# EAGLE board PCB Stream Desk STM32 (EAGLE 7.7.0)
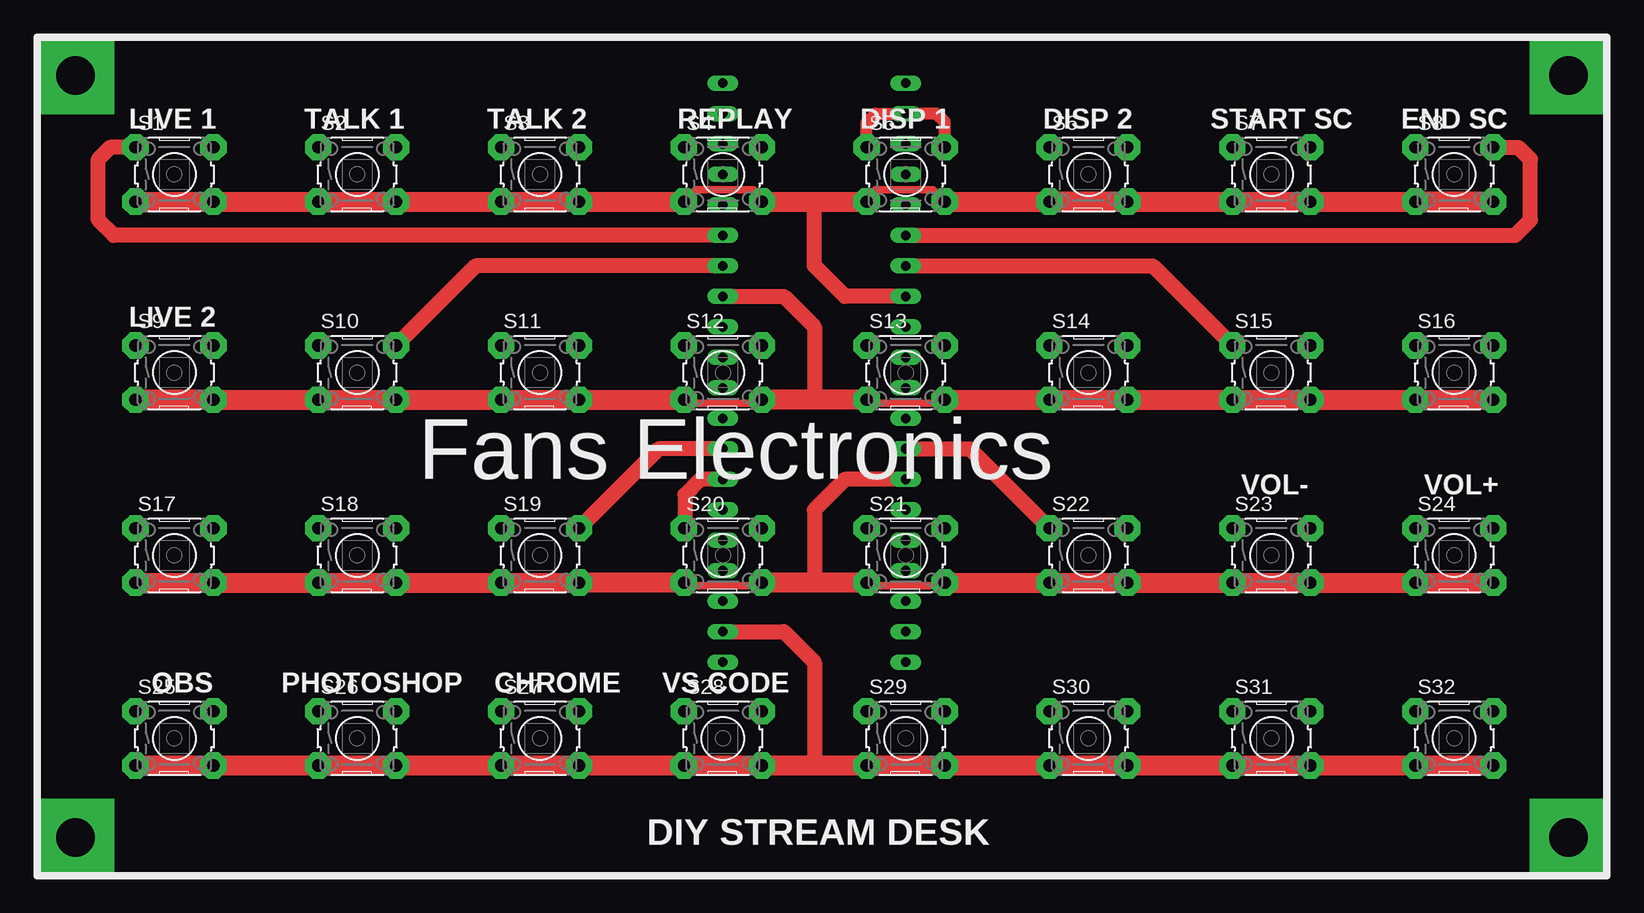
[diagram p0: board, top side]
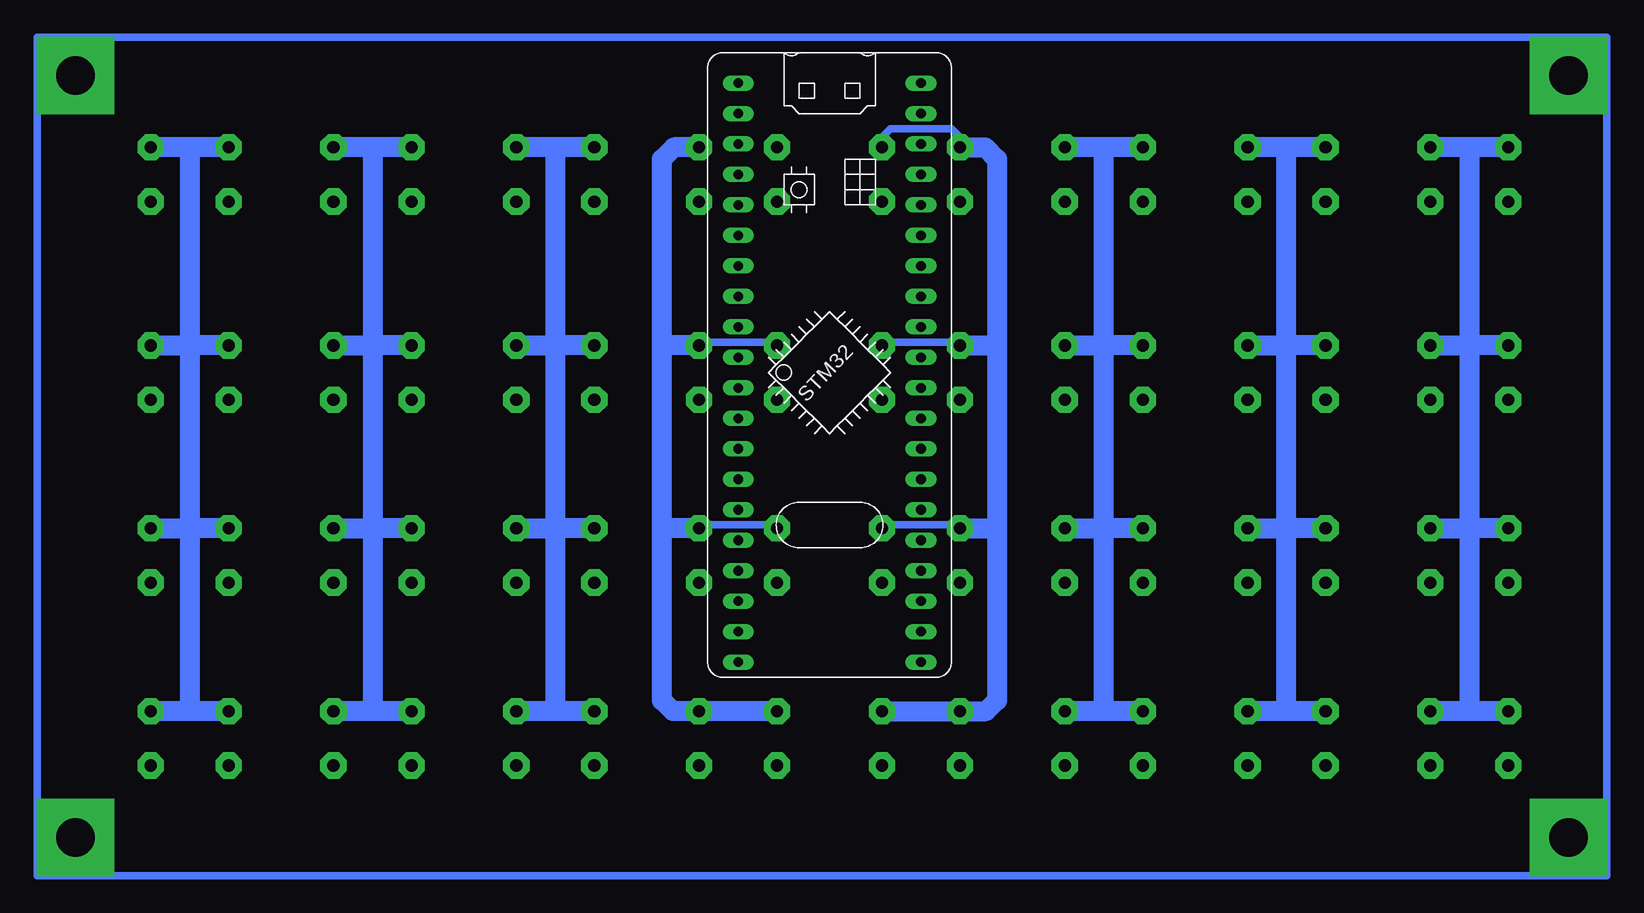
[diagram p1: board, bottom side, seen from below]

No outline drawn. Coordinates in mm, seen from the top.
Copper layers (1*16): Top 0.035mm / dielectric 1.5mm / Bottom 0.035mm
Design rules "default": minimum track width 10mil, minimum drill 24mil, track to track 8mil, track to pad 8mil, pad to pad 8mil, via to via 8mil, smd to smd 8mil, copper to edge 40mil, drill to drill 8mil, minimum pad ring 10mil, minimum via ring 8mil, stop-mask expansion 4mil, vias tented up to drill 0mil, thermal gap 10mil

## Footprints (pad centres in the part's own frame; a part is rotated, then mirrored left to right if it is on the bottom)
TACT-6X6MM-OCTAGON = drill 1.016 pad 2.184 octagon: 1 -3.251,2.261; 2 3.251,2.261; 3 -3.251,-2.261; 4 3.251,-2.261
BLUE_PILL = drill 0.8 long: 1 -7.62,15.24; 2 -7.62,12.7; 3 -7.62,10.16; 4 -7.62,7.62; 5 -7.62,5.08; 6 -7.62,2.54; 7 -7.62,0; 8 -7.62,-2.54; 9 -7.62,-5.08; 10 -7.62,-7.62; 11 -7.62,-10.16; 12 -7.62,-12.7; 13 -7.62,-15.24; 14 -7.62,-17.78; 15 -7.62,-20.32; 16 -7.62,-22.86; 17 -7.62,-25.4; 18 -7.62,-27.94; 19 -7.62,-30.48; 20 -7.62,-33.02; 21 7.62,-33.02; 22 7.62,-30.48; 23 7.62,-27.94; 24 7.62,-25.4; 25 7.62,-22.86; 26 7.62,-20.32; 27 7.62,-17.78; 28 7.62,-15.24; 29 7.62,-12.7; 30 7.62,-10.16; 31 7.62,-7.62; 32 7.62,-5.08; 33 7.62,-2.54; 34 7.62,0; 35 7.62,2.54; 36 7.62,5.08; 37 7.62,7.62; 38 7.62,10.16; 39 7.62,12.7; 40 7.62,15.24

## Placement (x,y rotation side)
S1  [TACT-6X6MM-OCTAGON]  41.91,21.59 0 top
S2  [TACT-6X6MM-OCTAGON]  57.15,21.59 0 top
S3  [TACT-6X6MM-OCTAGON]  72.39,21.59 0 top
S4  [TACT-6X6MM-OCTAGON]  87.63,21.59 0 top
S5  [TACT-6X6MM-OCTAGON]  102.87,21.59 0 top
S6  [TACT-6X6MM-OCTAGON]  118.11,21.59 0 top
S7  [TACT-6X6MM-OCTAGON]  133.35,21.59 0 top
S8  [TACT-6X6MM-OCTAGON]  148.59,21.59 0 top
S9  [TACT-6X6MM-OCTAGON]  41.91,5.08 0 top
S10  [TACT-6X6MM-OCTAGON]  57.15,5.08 0 top
S11  [TACT-6X6MM-OCTAGON]  72.39,5.08 0 top
S12  [TACT-6X6MM-OCTAGON]  87.63,5.08 0 top
S13  [TACT-6X6MM-OCTAGON]  102.87,5.08 0 top
S14  [TACT-6X6MM-OCTAGON]  118.11,5.08 0 top
S15  [TACT-6X6MM-OCTAGON]  133.35,5.08 0 top
S16  [TACT-6X6MM-OCTAGON]  148.59,5.08 0 top
S17  [TACT-6X6MM-OCTAGON]  41.91,-10.16 0 top
S18  [TACT-6X6MM-OCTAGON]  57.15,-10.16 0 top
S19  [TACT-6X6MM-OCTAGON]  72.39,-10.16 0 top
S20  [TACT-6X6MM-OCTAGON]  87.63,-10.16 0 top
S21  [TACT-6X6MM-OCTAGON]  102.87,-10.16 0 top
S22  [TACT-6X6MM-OCTAGON]  118.11,-10.16 0 top
S23  [TACT-6X6MM-OCTAGON]  133.35,-10.16 0 top
S24  [TACT-6X6MM-OCTAGON]  148.59,-10.16 0 top
S25  [TACT-6X6MM-OCTAGON]  41.91,-25.4 0 top
S26  [TACT-6X6MM-OCTAGON]  57.15,-25.4 0 top
S27  [TACT-6X6MM-OCTAGON]  72.39,-25.4 0 top
S28  [TACT-6X6MM-OCTAGON]  87.63,-25.4 0 top
S29  [TACT-6X6MM-OCTAGON]  102.87,-25.4 0 top
S30  [TACT-6X6MM-OCTAGON]  118.11,-25.4 0 top
S31  [TACT-6X6MM-OCTAGON]  133.35,-25.4 0 top
S32  [TACT-6X6MM-OCTAGON]  148.59,-25.4 0 top
U$1  [BLUE_PILL]  95.25,13.97 0 bottom

## Library data of the parts
S1-S32 = FansElectronics-Switch
U$1 = BluePill

## Nets
COL1: S1.1 S1.2 S9.1 S9.2 S17.1 S17.2 S25.1 S25.2 U$1.35
COL2: S2.1 S2.2 S10.1 S10.2 S18.1 S18.2 S26.1 S26.2 U$1.34
COL3: S3.1 S3.2 S11.1 S11.2 S19.1 S19.2 S27.1 S27.2 U$1.28
COL4: S4.1 S4.2 S12.1 S12.2 S20.1 S20.2 S28.1 S28.2 U$1.27
COL5: S5.1 S5.2 S13.1 S13.2 S21.1 S21.2 S29.1 S29.2 U$1.2
COL6: S6.1 S6.2 S14.1 S14.2 S22.1 S22.2 S30.1 S30.2 U$1.13
COL7: S7.1 S7.2 S15.1 S15.2 S23.1 S23.2 S31.1 S31.2 U$1.7
COL8: S8.1 S8.2 S16.1 S16.2 S24.1 S24.2 S32.1 S32.2 U$1.6
GND1: U$1.40
ROW1: S1.3 S1.4 S2.3 S2.4 S3.3 S3.4 S4.3 S4.4 S5.3 S5.4 S6.3 S6.4 S7.3 S7.4 S8.3 S8.4 U$1.8
ROW2: S9.3 S9.4 S10.3 S10.4 S11.3 S11.4 S12.3 S12.4 S13.3 S13.4 S14.3 S14.4 S15.3 S15.4 S16.3 S16.4 U$1.33
ROW3: S17.3 S17.4 S18.3 S18.4 S19.3 S19.4 S20.3 S20.4 S21.3 S21.4 S22.3 S22.4 S23.3 S23.4 S24.3 S24.4 U$1.14
ROW4: S25.3 S25.4 S26.3 S26.4 S27.3 S27.4 S28.3 S28.4 S29.3 S29.4 S30.3 S30.4 S31.3 S31.4 S32.3 S32.4 U$1.22

## Tracks (layer width: path | path; a pad name or v marks a point on that pad's centre or on a via)
COL1
  Top 1.27: U$1.35 36.83,16.51 35.56,17.78 35.56,22.86 36.55,23.85 S1.1
  Bottom 1.676: 41.91,23.85 41.91,7.62 | 41.91,7.62 41.91,-7.62 | 41.91,-7.62 41.91,-8.26 | 41.91,-8.26 42.27,-7.9 S17.2 42.19,-7.9 41.91,-7.62 | S9.2 42.19,7.34 41.91,7.62 | S1.1 41.91,23.85 | 41.91,23.85 S1.2 | S17.1 41.63,-7.9 41.91,-7.62 | S9.1 41.63,7.34 41.91,7.62 | 41.91,-8.26 41.91,-23.14 | S25.1 41.91,-23.14 | 41.91,-23.14 S25.2
COL2
  Top 1.27: U$1.34 67.03,13.97 S10.2
  Bottom 1.676: 57.15,-23.14 57.15,-7.62 | 57.15,-7.62 57.15,7.62 | 57.15,7.62 57.15,23.85 | S10.2 59.69,7.34 57.43,7.34 | 57.43,7.34 57.15,7.62 | S18.2 57.43,-7.9 | 57.43,-7.9 57.15,-7.62 | S2.1 57.15,23.85 | 57.15,23.85 S2.2 | S18.1 57.43,-7.9 | S26.1 57.15,-23.14 | 57.15,-23.14 S26.2 | S10.1 57.43,7.34
COL3
  Top 1.27: U$1.28 82.27,-1.27 S19.2
  Bottom 1.676: 72.39,-23.14 72.39,-8.26 | 72.39,-8.26 72.39,-7.62 | 72.39,-7.62 72.39,6.99 | 72.39,6.99 72.39,23.85 | S11.2 72.75,7.34 | 72.75,7.34 72.39,6.99 | S19.2 72.75,-7.9 72.39,-8.26 | S3.1 72.39,23.85 | 72.39,23.85 S3.2 | S11.1 72.75,7.34 | S19.1 72.11,-7.9 72.39,-7.62 | S27.1 72.39,-23.14 | 72.39,-23.14 S27.2
COL4
  Top 1.27: U$1.27 85.72,-3.81 84.45,-5.08 84.45,-7.82 S20.1
  Bottom 0.61: S12.1 84.81,7.34 85.09,7.62 90.6,7.62 S12.2 | S20.1 84.81,-7.9 85.09,-7.62 90.6,-7.62 S20.2 | 84.38,23.57 S4.1 84.38,24.69 85.09,25.4 90.17,25.4 90.88,24.69 S4.2
  Bottom 1.676: 81.28,7.62 81.28,22.86 82.27,23.85 S4.1 | 81.28,7.62 81.28,-7.62 | 81.28,-7.62 81.28,-22.23 82.19,-23.14 S28.1 S28.2 | S20.1 81.56,-7.9 81.28,-7.62 | S12.1 81.56,7.34 81.28,7.62
COL5
  Top 1.016: S5.1 99.62,25.96 100.33,26.67 U$1.2 105.41,26.67 106.12,25.96 S5.2
  Bottom 0.61: S13.2 105.69,7.34 105.41,7.62 99.9,7.62 S13.1 | S21.2 105.69,-7.9 105.41,-7.62 99.9,-7.62 S21.1
  Bottom 1.676: 109.22,-7.62 109.22,-22.23 108.31,-23.14 S29.2 S29.1 | 109.22,-7.62 109.22,7.62 | 109.22,7.62 109.22,22.86 108.23,23.85 S5.2 | S13.2 108.94,7.34 109.22,7.62 | S21.2 108.94,-7.9 109.22,-7.62
COL6
  Top 1.27: U$1.13 108.23,-1.27 S22.1
  Bottom 1.676: 118.11,23.85 118.11,7.62 | 118.11,7.62 118.11,-7.62 | 118.11,-7.62 118.11,-23.14 | S14.1 117.83,7.34 118.11,7.62 | S22.1 117.83,-7.9 | 117.83,-7.9 118.11,-7.62 | S22.2 117.83,-7.9 | S14.2 118.39,7.34 118.11,7.62 | S6.1 118.11,23.85 | 118.11,23.85 S6.2 | S30.1 118.11,-23.14 | 118.11,-23.14 S30.2
COL7
  Top 1.27: U$1.7 123.47,13.97 S15.1
  Bottom 1.676: 133.35,23.85 133.35,7.62 | 133.35,7.62 133.35,-7.62 | 133.35,-7.62 133.35,-23.14 | S23.1 133.07,-7.9 133.35,-7.62 | S15.1 133.07,7.34 133.35,7.62 | S7.1 133.35,23.85 | 133.35,23.85 S7.2 | S15.2 133.63,7.34 133.35,7.62 | S23.2 133.63,-7.9 133.35,-7.62 | S31.1 133.35,-23.14 | 133.35,-23.14 S31.2
COL8
  Top 1.27: U$1.6 153.67,16.51 154.94,17.78 154.94,22.86 153.95,23.85 S8.2
  Bottom 1.676: 148.59,23.85 148.59,7.62 | 148.59,7.62 148.59,-7.62 | 148.59,-7.62 148.59,-23.14 | S24.1 148.31,-7.9 148.59,-7.62 | S16.1 148.31,7.34 148.59,7.62 | S8.1 148.59,23.85 | 148.59,23.85 S8.2 | S16.2 148.87,7.34 148.59,7.62 | S24.2 148.87,-7.9 148.59,-7.62 | S32.1 148.59,-23.14 | 148.59,-23.14 S32.2
N$1  (via drill 3.2 pad 6.45)
  other vias: 158.12,-33.66
N$2  (via drill 3.2 pad 6.45)
  other vias: 158.12,29.84
N$3  (via drill 3.2 pad 6.45)
  other vias: 33.66,29.84
N$4  (via drill 3.2 pad 6.45)
  other vias: 33.66,-33.66
N$5
  Top 0.61: 30.48,33.02 161.29,33.02 161.29,-36.83 30.48,-36.83 30.48,33.02
N$6
  Bottom 0.61: 30.48,33.02 161.29,33.02 161.29,-36.83 30.48,-36.83 30.48,33.02
ROW1
  Top 0.61: S4.4 90.88,19.61 90.17,20.32 85.37,20.32 S4.3 | 99.9,19.05 99.9,19.89 100.33,20.32 105.13,20.32 S5.4
  Top 1.016: S5.3 99.9,19.05 95.25,19.05 | 106.4,19.05 106.68,19.33
  Top 1.27: U$1.8 97.79,11.43 95.25,13.97 95.25,19.05
  Top 1.676: S1.3 S1.4 S2.3 S2.4 S3.3 S3.4 S4.3 | S4.4 S5.3 | S5.4 106.68,19.33 S6.3 S6.4 S7.3 S7.4 S8.3 S8.4
ROW2
  Top 0.61: S13.3 100.05,2.82 100.33,2.54 105.84,2.54 S13.4 | S12.3 84.81,2.82 85.09,2.54 90.6,2.54 S12.4
  Top 1.27: U$1.33 92.71,11.43 95.25,8.89 95.25,2.82
  Top 1.676: S9.3 S9.4 S10.3 S10.4 S11.3 S11.4 S12.3 | S13.3 95.25,2.82 S12.4 | S13.4 S14.3 S14.4 S15.3 S15.4 S16.3 S16.4
ROW3
  Top 0.61: S20.3 84.81,-12.42 85.09,-12.7 90.6,-12.7 S20.4 | S21.3 100.05,-12.42 100.33,-12.7 105.84,-12.7 S21.4
  Top 1.27: U$1.14 97.79,-3.81 95.25,-6.35 95.25,-12.42
  Top 1.676: S17.3 S17.4 S18.3 S18.4 S19.3 S19.4 S20.3 | S21.3 95.25,-12.42 S20.4 | S24.4 S24.3 S23.4 S23.3 S22.4 S22.3 S21.4
ROW4
  Top 1.27: U$1.22 92.71,-16.51 95.25,-19.05 95.25,-27.66
  Top 1.676: S25.3 S25.4 S26.3 S26.4 S27.3 S27.4 S28.3 S28.4 95.25,-27.66 S29.3 S29.4 S30.3 S30.4 S31.3 S31.4 S32.3 S32.4

## Text on the board
tPlace: LIVE 1 | TALK 1 | TALK 2 | REPLAY | DISP 1 | DISP 2 | START SC | END SC | LIVE 2 | Fans Electronics | VOL- | VOL+ | OBS | PHOTOSHOP | CHROME | VS CODE | DIY STREAM DESK